# Altium PCB PCB.PcbDoc (part 1 of 2)
Units mil, origin at the board's own origin, x right, y up, seen from the top; angles counter-clockwise.
Board outline 2112 x 1014.5 mil, 4 copper layers (Top Layer, Layer 1, Layer 2, Bottom Layer), stack 36.268 mil thick; 45 components, 36 nets, 214 pads, 253 vias.
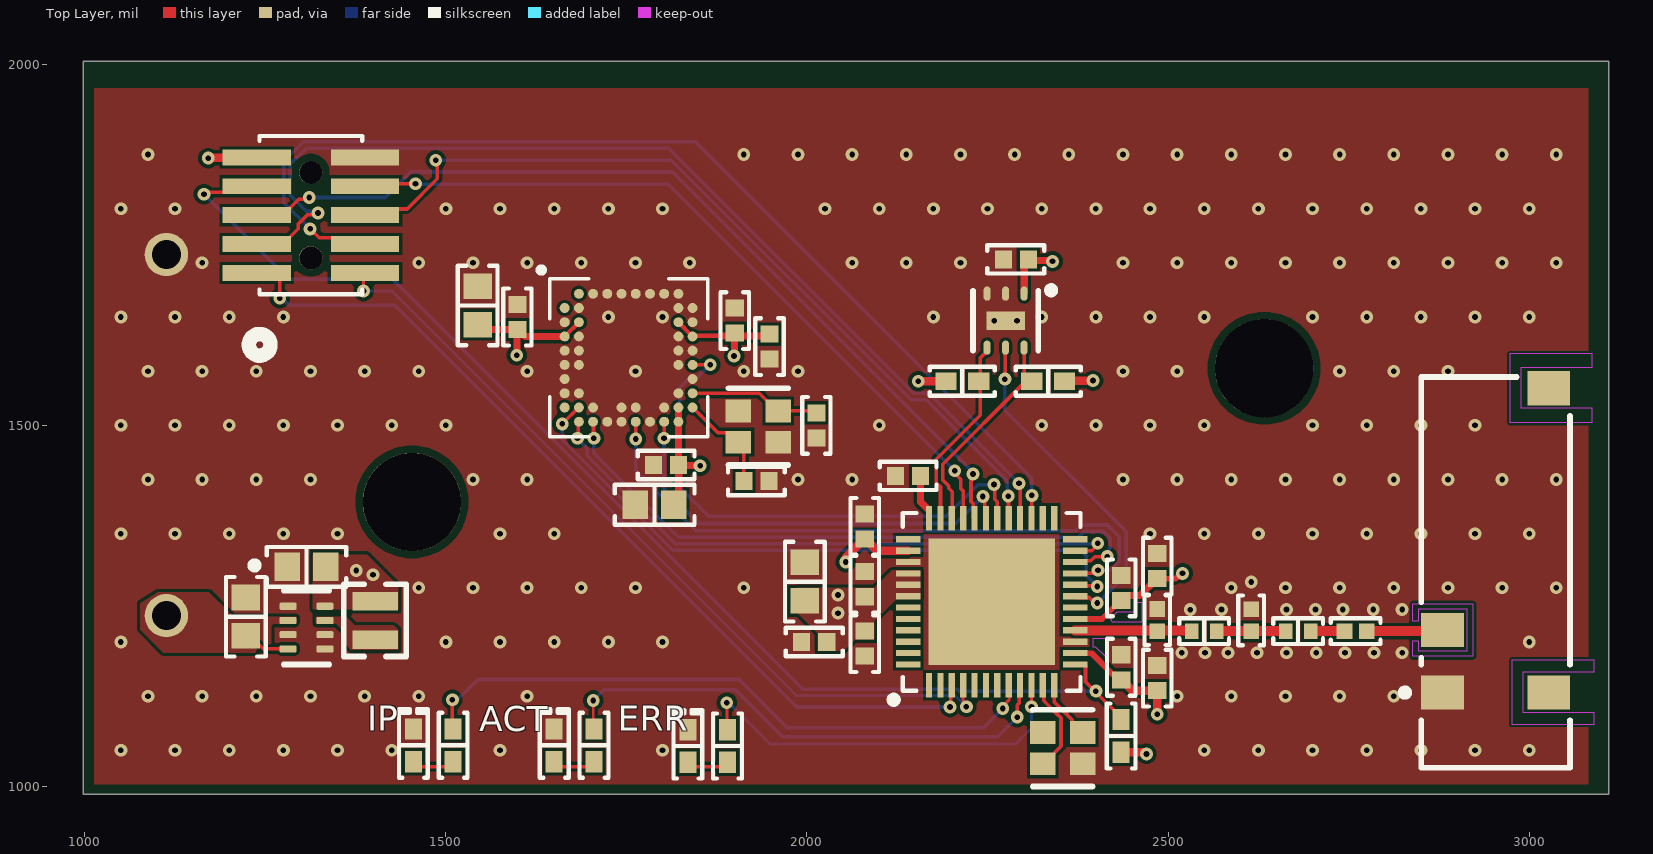
[diagram p0: Top Layer view]
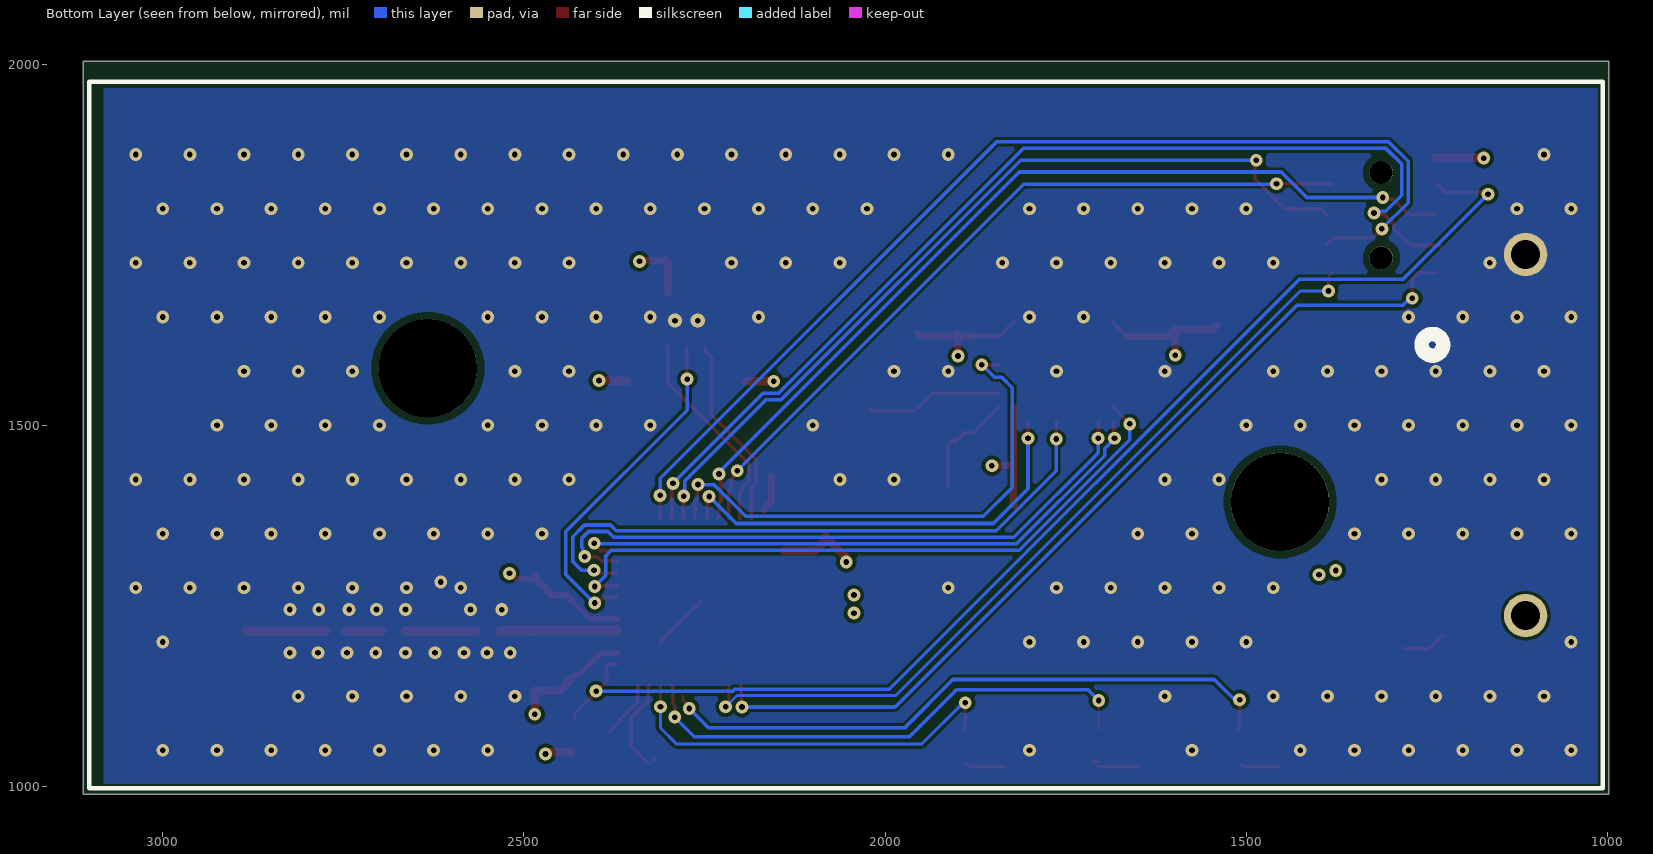
[diagram p1: Bottom Layer view, seen from below]
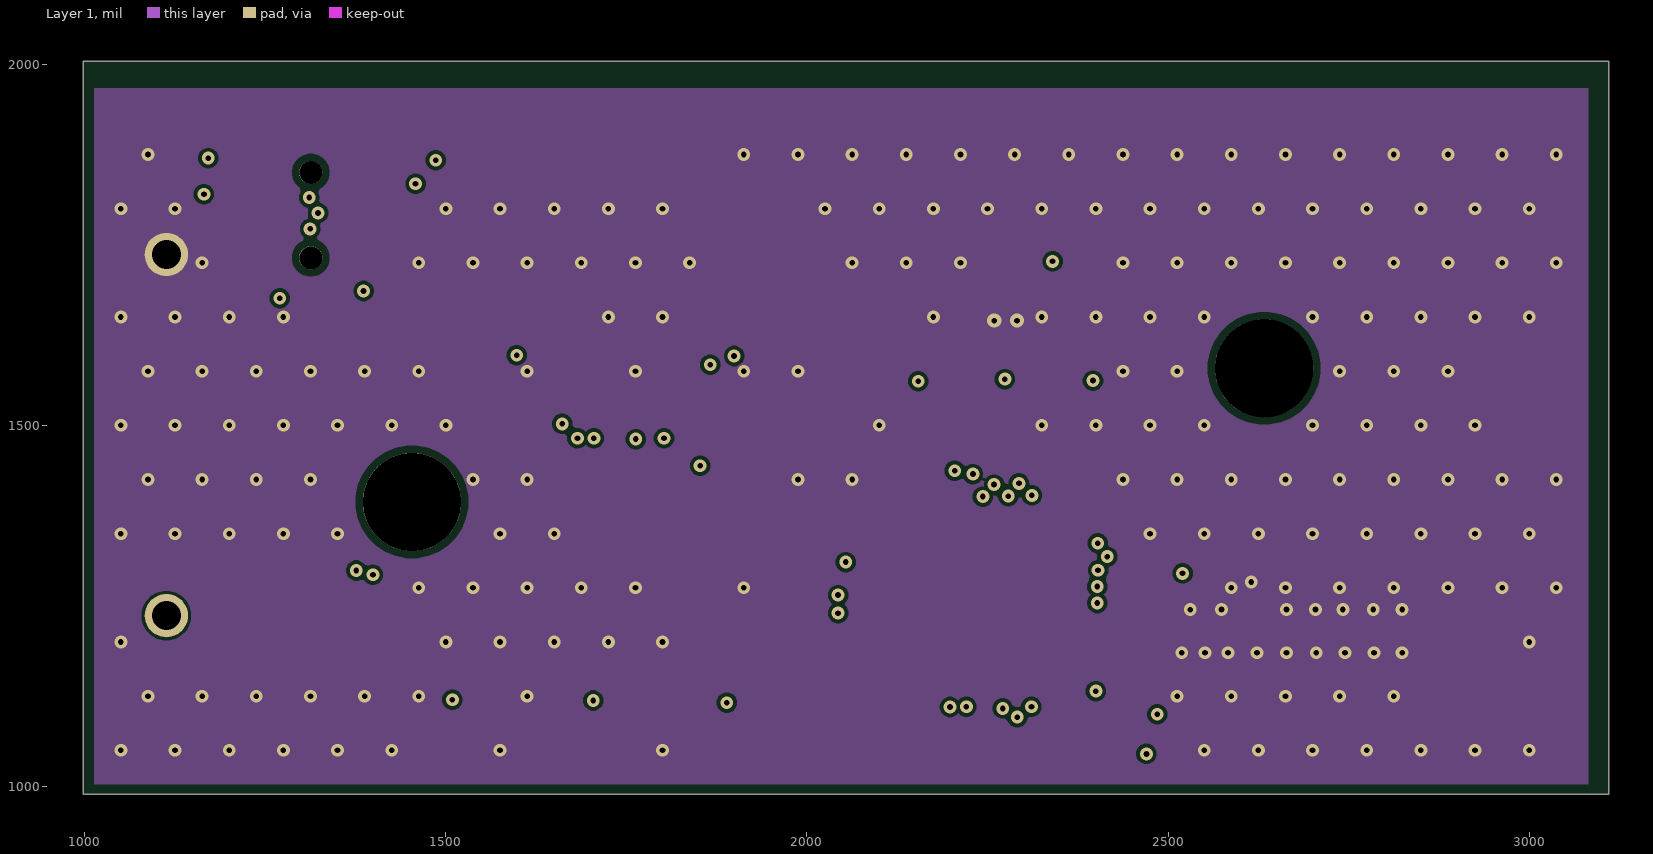
[diagram p2: Layer 1]
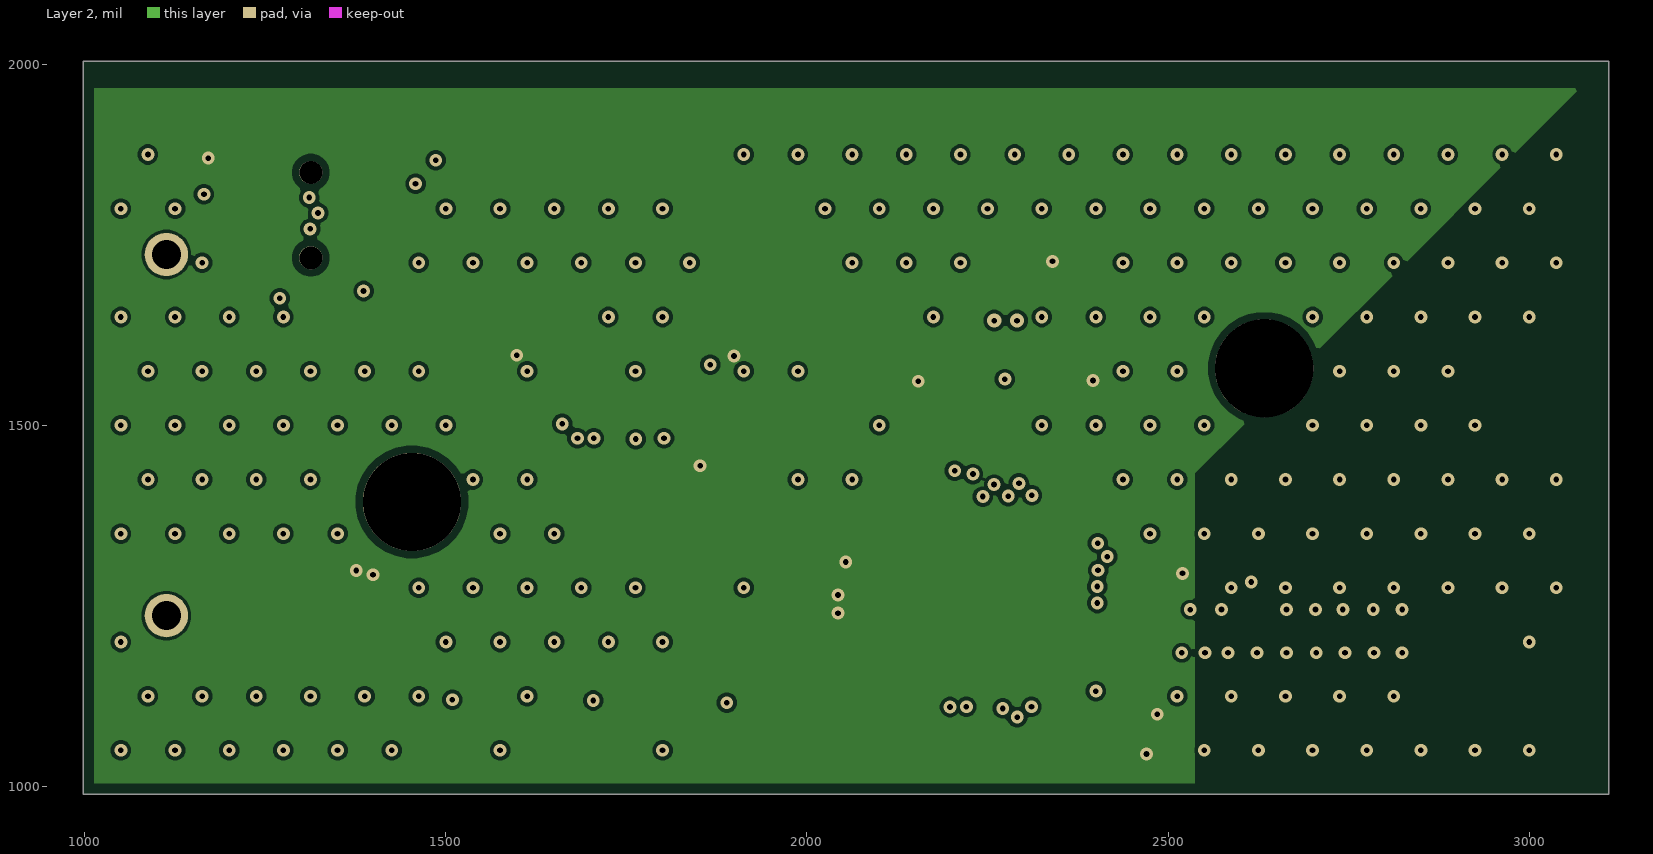
[diagram p3: Layer 2]

## Layer stack, top to bottom
Top Solder: solder mask 0.5, Solder Resist, Dk 3.8
Top Layer: signal copper 1.378
Dielectric 2: prepreg 8.284, PP-006, Dk 4.6
Layer 1: signal copper 0.598
Dielectric 1: dielectric 15.748, FR-4, Dk 4.6
Layer 2: signal copper 0.598
Dielectric 3: prepreg 8.284, PP-006, Dk 4.6
Bottom Layer: signal copper 1.378
Bottom Solder: solder mask 0.5, Solder Resist, Dk 3.8

## Board outline
998,989.5 3110,989.5 3110,2004 998,2004

## Design rules (kind name [scope] priority, off if disabled: settings)
BoardOutlineClearance [All] p1: gap=7.87 ignorepadtopadclearanceinfootprint=FALSE
Clearance [All] p1: gap=4 ignorepadtopadclearanceinfootprint=FALSE except(5: Arc-Via Track-Via SMDPad-Via THPad-Via Via-Via Via-Fill Via-Poly Via-Region Via-Text; 9.84: Arc-Hole Track-Hole SMDPad-Hole THPad-Hole Via-Hole Fill-Hole Poly-Hole Region-Hole Text-Hole)
ComponentClearance [All] p1: gap=4 collisioncheckmode=3 verticalgap=4 showdistances=TRUE
DiffPairsRouting [All] p1: maxlimit=4 minlimit=4 mostfreqgap=4 toplayer_minwidth=4 toplayer_maxwidth=71497.94 toplayer_prefwidth=4 midlayer1_minwidth=4 midlayer1_maxwidth=71497.94 midlayer1_prefwidth=4 midlayer2_minwidth=4 midlayer2_maxwidth=71497.94 midlayer2_prefwidth=4 bottomlayer_minwidth=4 bottomlayer_maxwidth=71497.94 bottomlayer_prefwidth=4 maxuncoupledlength=500
Height [All] p1: minheight=0 maxheight=71497.94 prefheight=500
HoleSize [All] p1: absolutevalues=TRUE maxlimit=248.03 minlimit=7.87 maxpercent=80.000 minpercent=20.000
HoleToHoleClearance [All] p1: gap=9.84 allowstackedmicrovias=FALSE
MinimumAnnularRing [All] p1: minimumring=3
MinimumSolderMaskSliver [All] p1: minsoldermaskwidth=0
PlaneClearance [All] p1: clearance=4
PlaneConnect PlaneConnectPowerPads [InPadClass('PowerPads')] p1: planeconnectstyle=Direct reliefexpansion=20 reliefentries=4 reliefconductorwidth=10 reliefairgap=10
PlaneConnect [All] p2: planeconnectstyle=Direct reliefexpansion=11.81 reliefentries=4 reliefconductorwidth=4 reliefairgap=4
PolygonConnect PolygonConnectPowerPads [All vs (InPadClass('PowerPads'))] p1: connectstyle=Direct reliefconductorwidth=10 reliefentries=4 polygonreliefangle="90 Angle" airgapwidth=10
PolygonConnect [All] p2: connectstyle=Direct reliefconductorwidth=4 reliefentries=4 polygonreliefangle="90 Angle" airgapwidth=4
RoutingVias [All] p1: holewidth=7.87 width=17.72 viastyle="Through Hole" minholewidth=7.87 minwidth=17.72 maxholewidth=248.03 maxwidth=257.87
SilkToSilkClearance [All] p1: silktosilkclearance=0
SilkToSolderMaskClearance [IsPad] p1: minsilkscreentomaskgap=4 clearancetoexposedcopper=TRUE
SolderMaskExpansion SolderMaskExpansion_Via [IsVia] p1: expansion=4 istentingtop=TRUE
SolderMaskExpansion [All] p2: expansion=1.5 istentingtop=FALSE
Width RF [InNetClass('RF')] p1: maxlimit=13.91 minlimit=8.57 preferedwidth=13.91 toplayer_minwidth=13.91 midlayer1_maxwidth=8.57 midlayer1_prefwidth=8.57 midlayer2_maxwidth=8.57 midlayer2_prefwidth=8.57 bottomlayer_minwidth=13.91 impedanceprofiledriven=TRUE impedanceprofileid={70AC5D85-C5B5-478E-8E20-9753D8737C4F} impedanceprofilevalue=50.000000 minimp=50.000000 maximp=50.000000 favimp=50.000000
Width [All] p2: maxlimit=71497.94 minlimit=4 preferedwidth=4
20 further rules are at their usual default settings.

## Classes and differential pairs
net class RF: NetANT1_2 NetC1_2 NetC3_2 NetC4_2
component class radar: C15 C17 C18 C19 C20 C25 R5 U2 U3 Y2
component class power: B1 C23 L3 U3 U4
component class mcu: C9 D1 D2 D3 J1 L1 L2 R1 R2 R3 R4 R5 R6 U1 U2 U4 Y1

## Components (designator, comment, footprint, x,y, rotation, side; value= is the part's Value field where it differs from the comment)
ANT1 "" FP-PRO-OB-440-MFG 2953.43,1296.34 r180 top
B1 "" 2468_KEY 1113,1236.5 r90 bottom
C1 "" "CAP 0402_1005 RF" 2759.65,1215 r180 top value="18 pF"
C2 "" "CAP 0402_1005" 2140,1430 r0 top value="1 µF"
C3 "" "CAP 0402_1005 RF" 2615,1230 r270 top value="1.6 pF"
C4 "" "CAP 0402_1005 RF" 2485,1230.35 r270 top value="2.3 pF"
C5 "" "CAP 0402_1005" 2080,1197.68 r90 top value="0.1 µF"
C6 "" "CAP 0402_1005" 2080,1280 r270 top value="0.1 µF"
C7 "" "CAP 0402_1005" 2080,1360 r270 top value="1 µF"
C8 "" "CAP 0402_1005" 2010,1200 r0 top value="1 µF"
C9 "" "CAP 0603_1608" 1997,1283.57 r270 top value="10 µF"
C10 "" "CAP 0402_1005" 2435,1165 r270 top value=100pF
C11 "" "CAP 0402_1005" 2435,1275 r270 top value="0.1 µF"
C12 "" "CAP 0402_1005" 2485,1150 r270 top value="0.1 µF"
C13 "" "CAP 0402_1005" 2485,1305 r270 top value="1 µF"
C14 "" "CAP 0402_1005" 2289.1,1729.78 r0 top value="0.1 µF"
C15 "" "CAP 0402_1005" 1930,1423 r180 top value="9 pF"
C16 "" "CAP 0402_1005" 2013,1500 r90 top value="9 pF"
C17 "" "CAP 0402_1005" 1805,1445 r0 top value="0.1 µF"
C18 "" "CAP 0402_1005" 1599,1650 r270 top value="0.1 µF"
C19 "" "CAP 0402_1005" 1900,1645 r270 top value="0.1 µF"
C20 "" "CAP 0402_1005" 1948,1609 r90 top value="1 µF"
C21 "" "CAP 0603_1608" 1544,1666 r90 top value="22 µF"
C22 "" "CAP 0603_1608" 1789,1390 r0 top value="22 µF"
C23 "" "CAP 0603_1608" 1223,1235 r270 top value=4.7uF
C24 "" "CAP 0603_1608" 1307,1304 r0 top value="10 µF"
D1 "" "LED 0402_1005 YELLOW" 1455,1057 r90 top value=Yellow
D2 "" "LED 0402_1005 YELLOW" 1650,1057 r90 top value=Yellow
D3 "" "LED 0402_1005 YELLOW" 1835,1056 r90 top value=Yellow
J1 "" CONN10_M40-3200545R_HRW 1313,1791 r90 top
L1 "" "IND 0402_1005 RF WW" 2680,1215 r180 top value="1.7 nH"
L2 "" "IND 0402_1005 RF WW" 2550,1215 r180 top value="2.5 nH"
L3 "" "TDK VLS201612CX" 1402,1230 r90 top value="2.2 µH"
R1 "" "RES 0402_1005" 1510,1057 r90 top
R2 "" "RES 0402_1005" 2334,1561 r0 top value="10 kOhms"
R3 "" "RES 0402_1005" 1705,1057 r90 top value="1.5 kOhms"
R4 "" "RES 0402_1005" 2215,1561 r180 top value="10 kOhms"
R5 "" "RES 0402_1005" 1890,1056 r90 top value="1.5 kOhms"
R6 "" "RES 0402_1005" 2435,1070 r90 top value="10 kOhms"
U1 "" QFN48_0p4_6sq_SIL 2255.63,1255.55 r90 top
U2 "" FP-DNP0006A-MFG 2275,1645 r270 top
U3 "" BGA50N50P10X10_520X550X89N 1753.04,1593.57 r0 top
U4 "" FP-DLC0008B-MFG 1307,1220 r0 top
Y1 "" FP-CX2016DB48000C0WPLA2-MFG 2354,1053 r0 top
Y2 "" FP-CX2016DB48000C0WPLA2-MFG 1932.56,1498.35 r0 top

## Footprints (in the part's own frame and the unit in brackets; to place one, negate y for a bottom-side part, rotate by r counter-clockwise, add the part's x,y. Pads: shape width x height; smd on the part's side, far side on the other; paste and mask are expansions set on the pad)
2468_KEY [mil]
  round 60 hole 40 mask+0: 1(0,0) 2(500,0)
  round 136 hole 136 unplated: 3(157.5,340) 4(342.5,1520)
  silkscreen extent -239,-107 739,1989, body extent 0,0 10,10, height 10
BGA50N50P10X10_520X550X89N [mm]
  round 0.35 smd: A2(-1.75,2.25) A3(-1.25,2.25) A4(-0.75,2.25) A5(-0.25,2.25) A6(0.25,2.25) A7(0.75,2.25) A8(1.25,2.25) A9(1.75,2.25) B1(-2.25,1.75) B2(-1.75,1.75) B9(1.75,1.75) B10(2.25,1.75) C1(-2.25,1.25) C2(-1.75,1.25) C9(1.75,1.25) C10(2.25,1.25) D1(-2.25,0.75) D2(-1.75,0.75) D9(1.75,0.75) D10(2.25,0.75) E1(-2.25,0.25) E2(-1.75,0.25) E9(1.75,0.25) E10(2.25,0.25) F1(-2.25,-0.25) F2(-1.75,-0.25) F9(1.75,-0.25) F10(2.25,-0.25) G1(-2.25,-0.75) G10(2.25,-0.75) H1(-2.25,-1.25) H2(-1.75,-1.25) H9(1.75,-1.25) H10(2.25,-1.25) J1(-2.25,-1.75) J2(-1.75,-1.75) J3(-1.25,-1.75) J5(-0.25,-1.75) J6(0.25,-1.75) J8(1.25,-1.75) J9(1.75,-1.75) J10(2.25,-1.75) K2(-1.75,-2.25) K3(-1.25,-2.25) K4(-0.75,-2.25) K5(-0.25,-2.25) K6(0.25,-2.25) K7(0.75,-2.25) K8(1.25,-2.25) K9(1.75,-2.25)
  silkscreen extent -3.17,-2.78 2.78,3.18
"CAP 0402_1005" [mm] "Chip Capacitor, 2-Leads, Body 1.02x0.51mm, IPC Medium Density"
  rect 0.6x0.64 smd: 1(-0.44,0) 2(0.44,0)
  silkscreen extent -1,-0.5 1,0.5, body extent -0.5,-0.26 0.5,0.26, height 0.52
"CAP 0402_1005 RF" [mm] "Chip Capacitor, 2-Leads, Body 1.02x0.51mm, IPC High Density"
  rect 0.55x0.54 smd: 1(-0.39,0) 2(0.39,0)
  silkscreen extent -0.87,-0.45 0.87,0.45, body extent -0.5,-0.26 0.5,0.26, height 0.52
"CAP 0603_1608" [mm] "Chip Capacitor, 2-Leads, Body 1.60x0.80mm, IPC Medium Density"
  rect 0.9x1 smd: 1(-0.675,0) 2(0.675,0)
  silkscreen extent -1.4,-0.7 1.4,0.7, body extent -0.8,-0.41 0.8,0.41, height 0.82
CONN10_M40-3200545R_HRW [mm]
  rect 0.56x2.4 smd paste+0 mask+0: 1(-2.032,1.905) 2(-1.016,1.905) 3(0,1.905) 4(1.016,1.905) 5(2.032,1.905) 6(-2.032,-1.905) 7(-1.016,-1.905) 8(0,-1.905) 9(1.016,-1.905) 10(2.032,-1.905)
  round 0.813 hole 0.813 unplated: 11(-1.5,0) 12(1.5,0)
  silkscreen extent -4.94,-1.8 2.78,2.18, body extent 0,0 0.25,0.25, height 0.25
FP-CX2016DB48000C0WPLA2-MFG [mm]
  rect 0.9x0.8 smd paste+0 mask+0: 1(-0.7,-0.55) 2(0.7,-0.55) 3(0.7,0.55) 4(-0.7,0.55)
  silkscreen extent -6.07,-1.35 1.05,1.83, body extent -1.25,-1.05 1.25,1.05, height 0.25
FP-DLC0008B-MFG [mm]
  rrect40% 0.6x0.25 smd paste+0 mask+0: 1(-0.65,0.75) 2(-0.65,0.25) 3(-0.65,-0.25) 4(-0.65,-0.75) 5(0.65,-0.75) 6(0.65,-0.25) 7(0.65,0.25) 8(0.65,0.75)
  silkscreen extent -1.95,-1.3 0.8,2.31, body extent -1.05,-1.15 1.05,1.15, height 0.25
FP-DNP0006A-MFG [mm]
  rrect100% 0.5x0.25 smd paste+0 mask+0: 1(-0.95,0.65) 2(-0.95,0) 3(-0.95,-0.65) 4(0.95,-0.65) 5(0.95,0) 6(0.95,0.65)
  rect 0.65x1.35 smd paste-1000 mask+0: 7(0,0)
  silkscreen extent -1.19,-1.15 1.05,1.73, body extent -1.3,-1.15 1.3,1.15, height 0.25
FP-PRO-OB-440-MFG [mm]
  rect 1.5x1.2 smd paste+0 mask+0: 1(1.865,4.225) 2(1.865,2.025) 3(-1.865,4.225) 4(-1.865,-6.475)
  silkscreen extent -2.62,-6.88 3.31,6.88
"IND 0402_1005 RF WW" [mm] "Chip Inductor, 2-Leads, Body 1.00x0.50mm, IPC High Density"
  rect 0.48x0.54 smd: 1(-0.44,0) 2(0.44,0)
  silkscreen extent -0.87,-0.45 0.87,0.45, body extent -0.5,-0.29 0.5,0.29, height 0.51
"LED 0402_1005 YELLOW" [mm] "Chip Diode, 2-Leads, Body 1.00x0.50mm, IPC Medium Density"
  rect 0.75x0.6 smd: 1(-0.575,0) 2(0.575,0)
  silkscreen extent -1.14,-0.51 1.27,0.51, body extent -0.5,-0.25 0.5,0.25, height 0.21
QFN48_0p4_6sq_SIL [mm]
  rect 0.86x0.22 smd paste+0 mask+0: 1(-2.935,2.2) 2(-2.935,1.8) 3(-2.935,1.4) 4(-2.935,1) 5(-2.935,0.6) 6(-2.935,0.2) 7(-2.935,-0.2) 8(-2.935,-0.6) 9(-2.935,-1) 10(-2.935,-1.4) 11(-2.935,-1.8) 12(-2.935,-2.2) 25(2.935,-2.2) 26(2.935,-1.8) 27(2.935,-1.4) 28(2.935,-1) 29(2.935,-0.6) 30(2.935,-0.2) 31(2.935,0.2) 32(2.935,0.6) 33(2.935,1) 34(2.935,1.4) 35(2.935,1.8) 36(2.935,2.2)
  rect 0.22x0.86 smd paste+0 mask+0: 13(-2.2,-2.935) 14(-1.8,-2.935) 15(-1.4,-2.935) 16(-1,-2.935) 17(-0.6,-2.935) 18(-0.2,-2.935) 19(0.2,-2.935) 20(0.6,-2.935) 21(1,-2.935) 22(1.4,-2.935) 23(1.8,-2.935) 24(2.2,-2.935) 37(2.2,2.935) 38(1.8,2.935) 39(1.4,2.935) 40(1,2.935) 41(0.6,2.935) 42(0.2,2.935) 43(-0.2,2.935) 44(-0.6,2.935) 45(-1,2.935) 46(-1.4,2.935) 47(-1.8,2.935) 48(-2.2,2.935)
  rect 4.45x4.45 smd paste-2.212 mask+0: 49(0,0)
  silkscreen extent -3.13,-3.13 3.13,3.13, body extent -3,-3 3,3, height 0.9
"RES 0402_1005" [mm] "Chip Resistor, 2-Leads, Body 1.0x0.5mm, IPC Medium Density"
  rect 0.75x0.6 smd: 1(-0.575,0) 2(0.575,0)
  silkscreen extent -1.14,-0.51 1.14,0.51, body extent -0.5,-0.25 0.5,0.25, height 0.35
"TDK VLS201612CX" [mm] "Inductor, 2-Leads, Body 2.00x1.60mm, IPC Medium Density"
  rect 0.65x1.6 smd: 1(-0.675,0) 2(0.675,0)
  silkscreen extent -1.27,-1.1 1.27,1.1, body extent -1,-0.8 1,0.8, height 1.2

## Part data
ANT1: library part CMP-231248-000001-1, "RF ANT 2.4GHZ STAMPED MET SLD", Manufacturer=ProAnt, Manufacturer Part Number=PRO-OB-440, Max Frequency=2500MHz, Temperature="-40°C to +125°C", Temperature Range High=+125°C, Temperature Range Low=-40°C, Automotive=No, Bandwidth=2400-2500MHz, Category=Ant, ComponentLink2Description=Datasheet, ComponentLink2URL=http://www.proant.se/files/user/Documents/Datasheets%20and%20appnotes/Upload%202018-06-08/Application%20note%20-%20OnBoard%20SMD%202400%20MHz%20rev%203.2.pdf, Device Class L1="Integrated Circuits (ICs)", Device Class L2="RF Semiconductors and Devices", Device Class L3="RF Antennas", Digikey Description="RF ANT 2.4GHZ STAMPED MET SLD", Height=3.53mm, Impedance=50Ω, Lead Free=Yes, Number Of Bands=1, Octopart=https://octopart.com/pro-ob-440-proant+ab-62921801, Package=PRO-OB-440, Return Loss=-10dB, RoHS=TRUE
B1: library part 2468, "No Description Available", Mfr_Name="Keystone Electronics", Copyright="Copyright (C) 2022 Ultra Librarian. All rights reserved.", Manufacturer_Part_Number=2468, RefDes=RefDes, Type=DEV
C1: library part 600L180FW200T, "CAP CER 18PF 200V NP0 0402", Capacitance="18 pF", Device Package="0402 (1005 Metric)", Manufacturer="American Technical Ceramics", Operating Temperature="-55°C ~ 125°C", Supplier Part Number 1=478-12298-1-ND, Temperature Coefficient="C0G, NP0", Tolerance=±1%, Voltage - Rated=200V, Applications="RF, Microwave, High Frequency, Bypass, Decoupling", componentlink1description=Datasheet, componentlink1url=http://www.atceramics.com/UserFiles/600l.pdf, ComponentLink2Description="DigiKey Link", ComponentLink2URL=https://www.digikey.com/en/products/detail/american-technical-ceramics/600L180FW200T/3908918, Features="High Q, Low Loss, Ultra Low ESR", lastupdated="1/9/2022 1:07:41 pm", Lifecycle Status=Active, Minimum Order=1, Mounting Type="Surface Mount, MLCC", Package / Case="0402 (1005 Metric)", packaging=TapeAndReel, Part Number=600L180FW200T, Part Status=Active, partid=1343, price=0.49, series="ATC 600L", Size / Dimension="0.040\" L x 0.020\" W (1.02mm x 0.51mm)", Supplier 1=DigiKey, Thickness (Max)="0.024\" (0.60mm)"
C2: library part C0402C104K7PAC7867, "CAP CER 0.1UF 4V X5R 0402", Capacitance="1 µF", Device Package="0402 (1005 Metric)", Manufacturer=KEMET, Operating Temperature="-55°C ~ 85°C", Supplier Part Number 1=399-14871-1-ND, Temperature Coefficient=X5R, Tolerance=±10%, Voltage - Rated=4V, Applications="Bypass, Decoupling", componentlink1description=Datasheet, componentlink1url=https://api.kemet.com/component-edge/download/datasheet/C0402C104K7PAC7867.pdf, ComponentLink2Description="DigiKey Link", ComponentLink2URL=https://www.digikey.com/en/products/detail/kemet/C0402C104K7PAC7867/7381987, lastupdated="1/9/2022 12:30:40 pm", Lifecycle Status=Active, Minimum Order=1, Mounting Type="Surface Mount, MLCC", Package / Case="0402 (1005 Metric)", packaging=TapeAndReel, Part Number=C0402C104K7PAC7867, Part Status=Active, partid=5603, price=0.01, series="SMD Comm X5R", Size / Dimension="0.039\" L x 0.020\" W (1.00mm x 0.50mm)", Supplier 1=DigiKey, Thickness (Max)="0.022\" (0.55mm)"
C3: library part GJM1555C1H1R6CB01D, "CAP CER 1.6PF 50V C0G/NP0 0402", Capacitance="1.6 pF", Device Package="0402 (1005 Metric)", Manufacturer="Murata Electronics", Operating Temperature="-55°C ~ 125°C", Supplier Part Number 1=490-3088-1-ND, Temperature Coefficient="C0G, NP0", Tolerance=±0.25pF, Voltage - Rated=50V, Applications="RF, Microwave, High Frequency", componentlink1description=Datasheet, componentlink1url=https://search.murata.co.jp/Ceramy/image/img/A01X/G101/ENG/GJM1555C1H1R6CB01-01.pdf, ComponentLink2Description="DigiKey Link", ComponentLink2URL=https://www.digikey.com/en/products/detail/murata-electronics/GJM1555C1H1R6CB01D/702281, Features="High Q, Low Loss", lastupdated="1/9/2022 1:07:42 pm", Lifecycle Status=Active, Minimum Order=1, Mounting Type="Surface Mount, MLCC", Package / Case="0402 (1005 Metric)", packaging=TapeAndReel, Part Number=GJM1555C1H1R6CB01D, Part Status=Active, partid=624, price=0.01, series=GJM, Size / Dimension="0.039\" L x 0.020\" W (1.00mm x 0.50mm)", Supplier 1=DigiKey, Thickness (Max)="0.022\" (0.55mm)"
C4: library part GJM1555C1H2R3BB01D, "CAP CER 2.3PF 50V C0G/NP0 0402", Capacitance="2.3 pF", Device Package="0402 (1005 Metric)", Manufacturer="Murata Electronics", Operating Temperature="-55°C ~ 125°C", Supplier Part Number 1=490-GJM1555C1H2R3BB01DCT-ND, Temperature Coefficient="C0G, NP0", Tolerance=±0.1pF, Voltage - Rated=50V, Applications="RF, Microwave, High Frequency", componentlink1description=Datasheet, componentlink1url=https://search.murata.co.jp/Ceramy/image/img/A01X/G101/ENG/GJM1555C1H2R3BB01-01.pdf, ComponentLink2Description="DigiKey Link", ComponentLink2URL=https://www.digikey.com/en/products/detail/murata-electronics/GJM1555C1H2R3BB01D/2592923, Features="High Q, Low Loss", lastupdated="1/9/2022 1:07:39 pm", Lifecycle Status=Active, Minimum Order=1, Mounting Type="Surface Mount, MLCC", Package / Case="0402 (1005 Metric)", packaging=TapeAndReel, Part Number=GJM1555C1H2R3BB01D, Part Status=Active, partid=2854, price=0.02, series=GJM, Size / Dimension="0.039\" L x 0.020\" W (1.00mm x 0.50mm)", Supplier 1=DigiKey, Thickness (Max)="0.022\" (0.55mm)"
C5 C11 C12 C14 C17 C18 C19: library part C0402C104K7PAC7867, "CAP CER 0.1UF 4V X5R 0402", Capacitance="0.1 µF", Device Package="0402 (1005 Metric)", Manufacturer=KEMET, Operating Temperature="-55°C ~ 85°C", Supplier Part Number 1=399-14871-1-ND, Temperature Coefficient=X5R, Tolerance=±10%, Voltage - Rated=4V, Applications="Bypass, Decoupling", componentlink1description=Datasheet, componentlink1url=https://api.kemet.com/component-edge/download/datasheet/C0402C104K7PAC7867.pdf, ComponentLink2Description="DigiKey Link", ComponentLink2URL=https://www.digikey.com/en/products/detail/kemet/C0402C104K7PAC7867/7381987, Lifecycle Status=Active, Minimum Order=1, Mounting Type="Surface Mount, MLCC", Package / Case="0402 (1005 Metric)", packaging=TapeAndReel, Part Number=C0402C104K7PAC7867, Part Status=Active, partid=5603, price=0.01, series="SMD Comm X5R", Size / Dimension="0.039\" L x 0.020\" W (1.00mm x 0.50mm)", Supplier 1=DigiKey, Thickness (Max)="0.022\" (0.55mm)"
  C5 C11 C12 C14: lastupdated="1/9/2022 12:30:40 pm"
  C17 C18 C19: lastupdated="11/9/2022 9:36:31 am"
C6: library part C0402C104K4RECAUTO, "CAP CER 0402 0.1UF 16V X7R 10%", Capacitance="0.1 µF", Device Package="0402 (1005 Metric)", Manufacturer=KEMET, Operating Temperature="-55°C ~ 125°C", Ratings=AEC-Q200, Supplier Part Number 1=399-17167-1-ND, Temperature Coefficient=X7R, Tolerance=±10%, Voltage - Rated=16V, Applications="Automotive, ESD Protection", componentlink1description=Datasheet, componentlink1url=https://api.kemet.com/component-edge/download/datasheet/C0402C104K4RECAUTO.pdf, ComponentLink2Description="DigiKey Link", ComponentLink2URL=https://www.digikey.com/en/products/detail/kemet/C0402C104K4RECAUTO/8563695, lastupdated="1/9/2022 12:30:53 pm", Lifecycle Status=Active, Minimum Order=1, Mounting Type="Surface Mount, MLCC", Package / Case="0402 (1005 Metric)", packaging=TapeAndReel, Part Number=C0402C104K4RECAUTO, Part Status=Active, partid=1731, price=0.01, series="ESD SMD Auto X7R", Size / Dimension="0.039\" L x 0.020\" W (1.00mm x 0.50mm)", Supplier 1=DigiKey, Thickness (Max)="0.022\" (0.55mm)"
C7 C8: library part LMK105BJ105MVHF, "CAP CER 1UF 10V X5R 0402", Capacitance="1 µF", Device Package="0402 (1005 Metric)", Manufacturer="Taiyo Yuden", Operating Temperature="-55°C ~ 85°C", Ratings=AEC-Q200, Supplier Part Number 1=587-6276-1-ND, Temperature Coefficient=X5R, Tolerance=±20%, Voltage - Rated=10V, Applications="Automotive, SMPS Filtering", componentlink1description=Datasheet, componentlink1url="https://ds.yuden.co.jp/TYCOMPAS/ut/detail?pn=LMK105BJ105MVHF &u=M", ComponentLink2Description="DigiKey Link", ComponentLink2URL=https://www.digikey.com/en/products/detail/taiyo-yuden/LMK105BJ105MVHF/7403746, lastupdated="1/9/2022 12:30:35 pm", Lifecycle Status=Active, Minimum Order=1, Mounting Type="Surface Mount, MLCC", Package / Case="0402 (1005 Metric)", packaging=TapeAndReel, Part Number=LMK105BJ105MVHF, Part Status=Active, partid=46675, price=0.01, series=M, Size / Dimension="0.039\" L x 0.020\" W (1.00mm x 0.50mm)", Supplier 1=DigiKey, Thickness (Max)="0.022\" (0.55mm)"
C9 C23 C24: library part GRM188R60J106ME47D, "CAP CER 10UF 6.3V X5R 0603", Capacitance="10 µF", Device Package="0603 (1608 Metric)", Manufacturer="Murata Electronics", Operating Temperature="-55°C ~ 85°C", Supplier Part Number 1=490-3896-1-ND, Temperature Coefficient=X5R, Tolerance=±20%, Voltage - Rated=6.3V, Applications="General Purpose", componentlink1description=Datasheet, componentlink1url=https://www.murata.com/~/media/webrenewal/support/library/catalog/products/capacitor/mlcc/c02e.ashx?la=en-us, ComponentLink2Description="DigiKey Link", ComponentLink2URL=https://www.digikey.com/en/products/detail/murata-electronics/GRM188R60J106ME47D/965910, lastupdated="11/9/2022 9:40:24 am", Lifecycle Status=Active, Minimum Order=1, Mounting Type="Surface Mount, MLCC", Package / Case="0603 (1608 Metric)", packaging=TapeAndReel, Part Number=GRM188R60J106ME47D, Part Status=Active, partid=2351, price=0.02, series=GRM, Size / Dimension="0.063\" L x 0.031\" W (1.60mm x 0.80mm)", Supplier 1=DigiKey, Thickness (Max)="0.035\" (0.90mm)"
C10: library part 04026C101KAT2A, "CAP CER 100PF 6.3V X7R 0402", Capacitance=100pF, Device Package="0402 (1005 Metric)", Manufacturer="AVX Corporation", Operating Temperature="-55°C ~ 125°C", Supplier Part Number 1=478-12647-1-ND, Temperature Coefficient=X7R, Tolerance=±10%, Voltage - Rated=6.3V, Applications="General Purpose", componentlink1description=Datasheet, componentlink1url=http://datasheets.avx.com/X7RDielectric.pdf, ComponentLink2Description="DigiKey Link", ComponentLink2URL=http://digikey.com/product-detail/en/avx-corporation/04026C101KAT2A/478-12647-1-ND/9949180, lastupdated="8/2/2022 12:26:54 pm", Lifecycle Status=Active, Minimum Order=1, Mounting Type="Surface Mount, MLCC", Package / Case="0402 (1005 Metric)", packaging=TapeAndReel, Part Number=04026C101KAT2A, Part Status=Active, partid=4266, price=0.04, series=-, Size / Dimension="0.039\" L x 0.020\" W (1.00mm x 0.50mm)", Supplier 1=DigiKey, Thickness (Max)="0.022\" (0.56mm)"
C13: library part CGB2T1X5R0G105M022BC, "CAP CER 1UF 4V X5R 0402", Capacitance="1 µF", Device Package="0402 (1005 Metric)", Manufacturer="TDK Corporation", Operating Temperature="-55°C ~ 85°C", Supplier Part Number 1=445-15611-1-ND, Temperature Coefficient=X5R, Tolerance=±20%, Voltage - Rated=4V, Applications="General Purpose", componentlink1description=Datasheet, componentlink1url=https://product.tdk.com/info/en/catalog/datasheets/mlcc_commercial_lowprofile_en.pdf?ref_disty=digikey, ComponentLink2Description="DigiKey Link", ComponentLink2URL=https://www.digikey.com/en/products/detail/tdk-corporation/CGB2T1X5R0G105M022BC/4278344, Features="Low Profile", lastupdated="1/9/2022 12:30:48 pm", Lifecycle Status=Active, Minimum Order=1, Mounting Type="Surface Mount, MLCC", Package / Case="0402 (1005 Metric)", packaging=TapeAndReel, Part Number=CGB2T1X5R0G105M022BC, Part Status=Active, partid=2563, price=0.08, series=CGB, Size / Dimension="0.039\" L x 0.020\" W (1.00mm x 0.50mm)", Supplier 1=DigiKey, Thickness (Max)="0.009\" (0.22mm)"
C15 C16: library part CGA2B2C0G1H090D050BA, "CAP CER 9PF 50V C0G 0402", Capacitance="9 pF", Device Package="0402 (1005 Metric)", Manufacturer="TDK Corporation", Operating Temperature="-55°C ~ 125°C", Ratings=AEC-Q200, Supplier Part Number 1=445-5583-1-ND, Temperature Coefficient="C0G, NP0", Tolerance=±0.5pF, Voltage - Rated=50V, Applications=Automotive, componentlink1description=Datasheet, componentlink1url=https://product.tdk.com/info/en/catalog/datasheets/mlcc_automotive_general_en.pdf?ref_disty=digikey, ComponentLink2Description="DigiKey Link", ComponentLink2URL=https://www.digikey.com/en/products/detail/tdk-corporation/CGA2B2C0G1H090D050BA/2443061, lastupdated="14/9/2022 7:45:59 am", Lifecycle Status=Active, Minimum Order=1, Mounting Type="Surface Mount, MLCC", Package / Case="0402 (1005 Metric)", packaging=TapeAndReel, Part Number=CGA2B2C0G1H090D050BA, Part Status=Active, partid=7122, price=0.01, series=CGA, Size / Dimension="0.039\" L x 0.020\" W (1.00mm x 0.50mm)", Supplier 1=DigiKey, Thickness (Max)="0.022\" (0.55mm)"
C20: library part LMK105C6105KV-F, "CAP CER 1UF 10V X6S 0402", Capacitance="1 µF", Device Package="0402 (1005 Metric)", Manufacturer="Taiyo Yuden", Operating Temperature="-55°C ~ 105°C", Supplier Part Number 1=587-3409-1-ND, Temperature Coefficient=X6S, Tolerance=±10%, Voltage - Rated=10V, Applications="SMPS Filtering", componentlink1description=Datasheet, componentlink1url=https://www.yuden.co.jp/productdata/catalog/mlcc01_e.pdf, ComponentLink2Description="DigiKey Link", ComponentLink2URL=https://www.digikey.com/en/products/detail/taiyo-yuden/LMK105C6105KV-F/4157226, lastupdated="11/9/2022 9:36:40 am", Lifecycle Status=Active, Minimum Order=1, Mounting Type="Surface Mount, MLCC", Package / Case="0402 (1005 Metric)", packaging=TapeAndReel, Part Number=LMK105C6105KV-F, Part Status=Active, partid=2215, price=0.01, series=M, Size / Dimension="0.039\" L x 0.020\" W (1.00mm x 0.50mm)", Supplier 1=DigiKey, Thickness (Max)="0.022\" (0.55mm)"
C21 C22: library part 0603ZD226MAT2A, "CAP CER 22UF 10V X5R 0603", Part Number=0603ZD226MAT2A
D1 D2 D3: library part BL-HKC37A-AV-TRB, "0402 YELLOW", Color=Yellow, Current - Test=20mA, Device Package="0402 (1005 Metric)", Lens Color=Colorless, Manufacturer="American Bright Optoelectronics Corporation", Millicandela Rating=120mcd, Supplier Device Package=0402, Supplier Part Number 1=BL-HKC37A-AV-TRBCT-ND, Voltage - Forward (Vf) (Typ)=2.2V, componentlink1description=Datasheet, componentlink1url=https://americanbrightled.com/pdffiles/smt/BL-HKC37A-AV-TRB.pdf, ComponentLink2Description="DigiKey Link", ComponentLink2URL=https://www.digikey.com/en/products/detail/american-bright-optoelectronics-corporation/BL-HKC37A-AV-TRB/9678171, Configuration=Standard, Height (Max)=0.45mm, lastupdated="11/9/2022 10:29:51 am", Lens Style="Rectangle with Flat Top", Lens Transparency=Clear, Lifecycle Status=Active, Minimum Order=1, Mounting Type="Surface Mount", Package / Case="0402 (1005 Metric)", packaging=TapeAndReel, Part Number=BL-HKC37A-AV-TRB, Part Status=Active, partid=1041, price=0.06, series=-, Size / Dimension="1.00mm L x 0.50mm W", Supplier 1=DigiKey, Viewing Angle=120°, Wavelength - Dominant=589nm, Wavelength - Peak=590nm
J1: library part M40-3200545R, "No Description Available", Mfr_Name=Harwin, Copyright="Copyright (C) 2022 Ultra Librarian. All rights reserved.", Manufacturer_Part_Number=M40-3200545R, RefDes=RefDes, Type=DEV
L1: library part LQW15AN1N7D8ZD, "FIXED IND 1.7NH 1.15A 65MOHM SMD", Current Rating (Amps)="1.15 A", DC Resistance (DCR)="65mOhm Max", Device Package="0402 (1005 Metric)", Frequency - Self Resonant=18GHz, Inductance="1.7 nH", Inductance Frequency - Test="100 MHz", Manufacturer="Murata Electronics", Operating Temperature="-55°C ~ 125°C", Q @ Freq="20 @ 250MHz", Ratings=AEC-Q200, Supplier Part Number 1=490-15358-1-ND, Tolerance=±0.5nH, componentlink1description=Datasheet, componentlink1url=https://search.murata.co.jp/Ceramy/image/img/P02/JELF243A-9138.pdf, ComponentLink2Description="DigiKey Link", ComponentLink2URL=https://www.digikey.com/en/products/detail/murata-electronics/LQW15AN1N7D8ZD/6798783, Height - Seated (Max)="0.024\" (0.60mm)", lastupdated="1/9/2022 1:17:33 pm", Lifecycle Status=Active, Material - Core=Non-Magnetic, Minimum Order=1, Mounting Type="Surface Mount", Package / Case="0402 (1005 Metric)", packaging=TapeAndReel, Part Number=LQW15AN1N7D8ZD, Part Status=Active, partid=80, price=0.07, series=LQW15, Shielding=Unshielded, Size / Dimension="0.039\" L x 0.024\" W (1.00mm x 0.60mm)", Supplier 1=DigiKey, Supplier Device Package="0402 (1005 Metric)", Type=Wirewound
L2: library part LQW15AN2N5B00D, "FIXED IND 2.5NH 850MA 50MOHM SMD", Current Rating (Amps)="850 mA", DC Resistance (DCR)="50mOhm Max", Device Package="0402 (1005 Metric)", Frequency - Self Resonant=15GHz, Inductance="2.5 nH", Inductance Frequency - Test="100 MHz", Manufacturer="Murata Electronics", Operating Temperature="-55°C ~ 125°C", Q @ Freq="20 @ 250MHz", Supplier Part Number 1=490-8437-1-ND, Tolerance=±0.1nH, componentlink1description=Datasheet, componentlink1url=https://search.murata.co.jp/Ceramy/image/img/P02/JELF243A-0050.pdf, ComponentLink2Description="DigiKey Link", ComponentLink2URL=https://www.digikey.com/en/products/detail/murata-electronics/LQW15AN2N5B00D/2594886, Height - Seated (Max)="0.024\" (0.60mm)", lastupdated="1/9/2022 1:17:31 pm", Lifecycle Status=Active, Material - Core=Non-Magnetic, Minimum Order=1, Mounting Type="Surface Mount", Package / Case="0402 (1005 Metric)", packaging=TapeAndReel, Part Number=LQW15AN2N5B00D, Part Status=Active, partid=337, price=0.05, series=LQW15, Shielding=Unshielded, Size / Dimension="0.039\" L x 0.024\" W (1.00mm x 0.60mm)", Supplier 1=DigiKey, Type=Wirewound
L3: library part VLS201612CX-6R8M-1, "FIXED IND 6.8UH 930MA 368MOHM SM", Current - Saturation=730mA, Current Rating (Amps)="930 mA", DC Resistance (DCR)="368mOhm Max", Device Package=Nonstandard, Inductance="6.8 µH", Inductance Frequency - Test="1 MHz", Manufacturer="TDK Corporation", Operating Temperature="-40°C ~ 105°C", Supplier Device Package=2016, Supplier Part Number 1=445-172966-1-ND, Tolerance=±20%, componentlink1description=Datasheet, componentlink1url=https://product.tdk.com/info/en/catalog/datasheets/inductor_commercial_power_vls201612cx-1_en.pdf?ref_disty=digikey, ComponentLink2Description="DigiKey Link", ComponentLink2URL=https://www.digikey.com/en/products/detail/tdk-corporation/VLS201612CX-6R8M-1/5169771, Height - Seated (Max)="0.047\" (1.20mm)", lastupdated="11/9/2022 10:31:03 am", Lifecycle Status=Active, Material - Core=Ferrite, Minimum Order=1, Mounting Type="Surface Mount", Package / Case=Nonstandard, packaging=TapeAndReel, Part Number=VLS201612CX-6R8M-1, Part Status=Active, partid=207, price=0.13, series=VLS-CX-1, Shielding=Shielded, Size / Dimension="0.079\" L x 0.063\" W (2.00mm x 1.60mm)", Supplier 1=DigiKey, Type="Drum Core, Wirewound"
R1 R3 R5: library part ERA-2VRW1501X, "RES 1.5K OHM 0.05% 1/10W 0402", Device Package="0402 (1005 Metric)", Manufacturer="Panasonic Electronic Components", Operating Temperature="-55°C ~ 155°C", Power (Watts)="0.1W, 1/10W", Ratings=AEC-Q200, Resistance="1.5 kOhms", Supplier Device Package=0402, Supplier Part Number 1=10-ERA-2VRW1501XCT-ND, Temperature Coefficient=±10ppm/°C, Tolerance=±0.05%, componentlink1description=Datasheet, componentlink1url=https://api.pim.na.industrial.panasonic.com/file_stream/main/fileversion/9152, ComponentLink2Description="DigiKey Link", ComponentLink2URL=https://www.digikey.com/en/products/detail/panasonic-electronic-components/ERA-2VRW1501X/12086957, Composition="Thin Film", Features="Anti-Sulfur, Automotive AEC-Q200", Height - Seated (Max)="0.016\" (0.40mm)", lastupdated="11/9/2022 9:53:08 am", Lifecycle Status=Active, Minimum Order=1, Number of Terminations=2, Package / Case="0402 (1005 Metric)", packaging=TapeAndReel, Part Number=ERA-2VRW1501X, Part Status=Active, partid=67400, price=0.24, series=ERA-2V, Size / Dimension="0.039\" L x 0.020\" W (1.00mm x 0.50mm)", Supplier 1=DigiKey
R2 R4 R6: library part RP73PF1E10KBTD, "RES 10K OHM 0.1% 1/10W 0402", Device Package="0402 (1005 Metric)", Manufacturer="TE Connectivity Passive Product", Operating Temperature="-55°C ~ 155°C", Power (Watts)="0.1W, 1/10W", Resistance="10 kOhms", Supplier Device Package=0402, Supplier Part Number 1=A127415CT-ND, Temperature Coefficient=±25ppm/°C, Tolerance=±0.1%, componentlink1description=Datasheet, componentlink1url=https://www.te.com/commerce/DocumentDelivery/DDEController?Action=srchrtrv&DocNm=1773272&DocType=DS&DocLang=English, ComponentLink2Description="DigiKey Link", ComponentLink2URL=https://www.digikey.com/en/products/detail/te-connectivity-passive-product/RP73PF1E10KBTD/8260957, Composition="Thin Film", Height - Seated (Max)="0.014\" (0.35mm)", lastupdated="1/9/2022 12:46:57 pm", Lifecycle Status=Active, Minimum Order=1, Number of Terminations=2, Package / Case="0402 (1005 Metric)", packaging=TapeAndReel, Part Number=RP73PF1E10KBTD, Part Status=Active, partid=2434, price=0.09, series="RP73, Holsworthy", Size / Dimension="0.039\" L x 0.020\" W (1.00mm x 0.50mm)", Supplier 1=DigiKey
U1: library part EFR32MG24B220F1536IM48, "No Description Available", Mfr_Name="Silicon Labs", Copyright="Copyright (C) 2022 Ultra Librarian. All rights reserved.", Manufacturer_Part_Number=EFR32MG24B220F1536IM48, RefDes=RefDes, Type=DEV
U2: library part CMP-04942-000002-1, "SENSOR OPT 550NM AMBIENT 6USON", Manufacturer="Texas Instruments", Manufacturer Part Number=OPT3001DNPR, Max Junction Temp=+150°C, Max Supply Voltage=3.6V, Min Supply Voltage=1.6V, Operating Supply Current=0.3-1.8uA, Package=DNP0006A, Temperature="-40°C to +85°C", Temperature Range High=+85°C, Temperature Range Low=-40°C, Automotive=No, Category=IC, ComponentLink2Description=Datasheet, ComponentLink2URL=http://www.ti.com/lit/ds/symlink/opt3001.pdf, Device Class L1=Sensors, Device Class L2="Optical Sensors", Device Class L3=unset, Digikey Description="SENSOR OPT 550NM AMBIENT 6USON", Height=0.65mm, Ipc Land Pattern Name=DFN200X200X60-6, Lead Free=Yes, Octopart=https://octopart.com/opt3001dnpr-texas+instruments-47324050, RoHS=TRUE, Sensor Output=I2C,SMBus, Standoff Height=0mm
U3: library part A111, "A111 Radar Sensor", Package="SMD-50 acconeer", Availability=Unavailable, MF=acconeer, MP=A111, price=None, SnapEDA_Link=https://www.snapeda.com/parts/A111/acconeer/view-part/2777907/?ref=snap
U4: library part CMP-04918-000086-1, "ULTRA LOW IQ BUCK CONVERTER", Manufacturer="Texas Instruments", Manufacturer Part Number=TPS62840DLCR, Max Junction Temp=+125°C, Max Supply Voltage=6.5V, Min Supply Voltage=1.8V, Nominal Supply Current=0.005-3000uA, Output Current=750mA, Output Voltage=1.8-3.3V, Package=DLC0008B, Switching Frequency=1.8MHz, Temperature="-40°C to +125°C", Temperature Range Low=-40°C, Automotive=No, Category=IC, ComponentLink2Description=Datasheet, ComponentLink2URL=http://www.ti.com/lit/ds/symlink/tps62840.pdf, Device Class L1="Integrated Circuits (ICs)", Device Class L2="Power Management ICs", Device Class L3="Voltage Regulators - Switching", Digikey Description="ULTRA LOW IQ BUCK CONVERTER", Height=1mm, Ipc Land Pattern Name=DFN200X150X100-8, Lead Free=Yes, Max Duty Cycle=100%, Mouser Description="60-nA IQ, 1.8-V to 6.5-VIN, high-efficiency 750-mA step-down converter 8-VSON-HR -40 to 125", Number Of Outputs=1, Octopart=https://octopart.com/tps62840dlcr-texas+instruments-103121111, Output Type=AdjustableProgrammable, RoHS=TRUE, Standoff Height=0mm, Switching Topology=Buck, Temperature Range High=+125°C
Y1 Y2: library part CMP-20727-000003-1, "CRYSTAL 48.0000MHZ 7PF SMD", Frequency=48000kHz, Load Capacitance=7pF, Manufacturer=Kyocera, Manufacturer Part Number=CX2016DB48000C0WPLA2, Package=0, Temperature="-40°C to +85°C", Temperature Range High=+85°C, Temperature Range Low=-40°C, Tolerance=20ppm, Automotive=No, Category=Crys, ComponentLink2Description=Datasheet, ComponentLink2URL=https://global.kyocera.com/prdct/electro/product/pdf/cx2016db_e.pdf, Device Class L1="Passive Components", Device Class L2="Crystals / Oscillators", Device Class L3=Crystals, Digikey Description="CRYSTAL 48.0000MHZ 7PF SMD", Esr=22Ω, Height=0.45mm, Lead Free=Yes, Mouser Description="Crystals 48MHz 7pF", Octopart=https://octopart.com/cx2016db48000c0wpla2-avx+%2F+kyocera-52876167, RoHS=TRUE, series=CX2016DB

## Via types
v1: diameter 17.72, hole 7.87, Top Layer to Bottom Layer, tented both sides, 251 vias
v2: diameter 19.68, hole 7.87, Top Layer to Bottom Layer, 2 vias

## Nets (pads, with @x,y where several pads share a name; then routed paths per layer and width w, separated by ;. In a path a pad name is that pad's centre, name@x,y a point inside that pad or via, vN(x,y) a via of type N, cw(c..) or ccw(c..) an arc to the next point about the centre after c; other vN are vias at no path point)
1V8: C5.2 C6.2 C7.2 C8.2 C9.2 C10.2 C11.2 C12.2 C13.2 C14.2 C17.2 C18.2 C19.2 C20.2 C21.1 C22.2 C24.2 J1.5 L3.2 R2.2 R4.2 R6.1 U1.14 U1.17 U1.38 U1.40 U1.41 U1.42 U2.1 U3.C2 U3.C9 U3.D1 U3.D10 U3.J9 U3.K9 U4.8 | length 1260.4
  Top Layer w6: U3.D1@1665,1625 1666.36,1625 U3.C2 ; U3.C9 1840.9,1623.82 1880.32,1623.82
  Top Layer w8: U1.14 2371.51,1184.35 2394.26,1184.35 2423.13,1155.49 2427.19,1155.49 C10.2 ; U1.17 2408.46,1231.93 C11.2@2434.61,1258.07 ; C13.2@2484.21,1287.68 C13.2 2510.05,1287.68 2517.37,1295 v1(2520,1295)
  Top Layer w10: C21.1@1540,1639 1546.32,1632.68 C18.2 1598.5,1632.18 1598.5,1597.5 v1(1598,1597) ; C18.2@1600,1634 1600,1632.46 1609.37,1623.09 U3.D1 ; C22.2@1821,1389 1822.32,1390.32 C17.2 ; U3.J9 U3.K9 1822.13,1504.79 1822.13,1445.19 C17.2 ; v1(1852,1444) 1851.5,1444.5 1822.82,1444.5 C17.2 ; 1880.32,1623.82 C19.2@1899.5,1623.82 ; v1(1899,1596) 1899.5,1596.5 C19.2@1899.5,1623.82 ; C19.2 1899.5,1627.18 C19.2@1899.5,1623.82 ; C20.2@1955,1627.32 1951.49,1623.82 1900,1623.82 C19.2@1899.5,1623.82 ; U2.1 2300.67,1682.48 2300.67,1725.67 C14.2@2305,1730 ; C14.2 2307.82,1728.39 2338.61,1728.39 v1(2340,1727) ; C11.2 2441.81,1264.49 2461.02,1264.49 2484.21,1287.68 2485,1288.46 C13.2@2485,1292
  Top Layer w12: v1(1171,1870) 1171.5,1870.5 1237.5,1870.5 J1.5 ; v1(2053.63,1310.64) 2054.72,1311.74 2054.72,1318.18 2079.21,1342.68 C7.2 ; C7.2@2082,1346 2082,1341.46 2097.05,1326.42 U1.38 ; v1(2154,1561) R4.2 ; R2.2 2357.14,1561.5 2395.5,1561.5 v1(2396,1562) ; R6.1 2466.09,1047.36 2468.45,1045 v1(2470,1045) ; C10.2 2435.79,1147.68 2450.79,1132.68 C12.2 v1(2485,1100)
  other v1: 2043,1240 2043,1265 1399,1293 1376,1299
GND: ANT1.1 B1.2 C2.1 C3.1 C4.1 C5.1 C6.1 C7.1 C8.1 C9.1 C10.1 C11.1 C12.1 C13.1 C14.1 C15.1 C16.1 C17.1 C18.1 C19.1 C20.1 C21.2 C22.1 C23.1 C24.1 D1.2 D2.2 D3.2 J1.10 U1.15 U1.39 U1.49 U2.2 U2.3 U2.7 U3.A3 U3.A4 U3.A5 U3.A6 U3.A7 U3.A8 U3.A9 U3.B2 U3.B9 U3.B10 U3.C1 U3.C10 U3.D2 U3.D9 U3.E1 U3.E2 U3.E9 U3.E10 U3.F1 U3.F2 U3.F9 U3.G1 U3.G10 U3.H1 U3.H2 U3.H9 U3.J3 U3.J5 U3.J6 U3.J8 U3.K4 U3.K5 U3.K7 U4.1 U4.3 U4.5 U4.6 Y1.2 Y2.2 Y2.4 | length 77.9
  Top Layer w6: U1.49 U1.49@2310.75,1200.43
  other v1: 1050,1050 1125,1050 1200,1050 1275,1050 1350,1050 1425,1050 1575,1050 1800,1050 2550,1050 2625,1050 2700,1050 2775,1050 2850,1050 2925,1050 3000,1050 1087.5,1125 1162.5,1125 1237.5,1125 1312.5,1125 1387.5,1125 1462.5,1125 1612.5,1125 2512.5,1125 2587.5,1125 2662.5,1125 2737.5,1125 2812.5,1125 2519,1185 2551,1185 2583,1185 2623,1185 2664,1185 2705,1185 2745,1185 2785,1185 2824,1185 1050,1200 1500,1200 1575,1200 1650,1200 1725,1200 1800,1200 3000,1200 2530.68,1244.86 2574,1245 2664,1245 2704,1245 2742,1245 2784,1245 2824,1245 1462.5,1275 1537.5,1275 1612.5,1275 1687.5,1275 1762.5,1275 1912.5,1275 2587.5,1275 2662.5,1275 2737.5,1275 2812.5,1275 2887.5,1275 2962.5,1275 3037.5,1275 2615,1283 1050,1350 1125,1350 1200,1350 1275,1350 1350,1350 1575,1350 1650,1350 2475,1350 2550,1350 2625,1350 2700,1350 2775,1350 2850,1350 2925,1350 3000,1350 1087.5,1425 1162.5,1425 1237.5,1425 1312.5,1425 1537.5,1425 1612.5,1425 1987.5,1425 2062.5,1425 2437.5,1425 2512.5,1425 2587.5,1425 2662.5,1425 2737.5,1425 2812.5,1425 2887.5,1425 2962.5,1425 3037.5,1425 1050,1500 1125,1500 1200,1500 1275,1500 1350,1500 1425,1500 1500,1500 2100,1500 2325,1500 2400,1500 2475,1500 2550,1500 2700,1500 2775,1500 2850,1500 2925,1500 1087.5,1575 1162.5,1575 1237.5,1575 1312.5,1575 1387.5,1575 1462.5,1575 1612.5,1575 1762.5,1575 1912.5,1575 1987.5,1575 2437.5,1575 2512.5,1575 2737.5,1575 2812.5,1575 2887.5,1575 1050,1650 1125,1650 1200,1650 1275,1650 1725,1650 1800,1650 2175,1650 2325,1650 2400,1650 2475,1650 2550,1650 2700,1650 2775,1650 2850,1650 2925,1650 3000,1650 1162.5,1725 1462.5,1725 1537.5,1725 1612.5,1725 1687.5,1725 1762.5,1725 1837.5,1725 2062.5,1725 2137.5,1725 2212.5,1725 2437.5,1725 2512.5,1725 2587.5,1725 2662.5,1725 2737.5,1725 2812.5,1725 2887.5,1725 2962.5,1725 3037.5,1725 1050,1800 1125,1800 1500,1800 1575,1800 1650,1800 1725,1800 1800,1800 2025,1800 2100,1800 2175,1800 2250,1800 2325,1800 2400,1800 2475,1800 2550,1800 2625,1800 2700,1800 2775,1800 2850,1800 2925,1800 3000,1800 1087.5,1875 1912.5,1875 1987.5,1875 2062.5,1875 2137.5,1875 2212.5,1875 2287.5,1875 2362.5,1875 2437.5,1875 2512.5,1875 2587.5,1875 2662.5,1875 2737.5,1875 2812.5,1875 2887.5,1875 2962.5,1875 3037.5,1875
  other v2: 2259.25,1645 2290.75,1645
HFXI: U1.11 Y1.1 | length 132.2
  Top Layer w5: Y1.1@2320,1035 Y1.1@2320,1038.82 ; U1.11 2327.56,1138.94 2327.56,1119.2 2331.41,1115.34 2331.41,1115.07 2347.58,1098.9 2347.85,1098.9 2351.66,1095.09 2351.66,1055.59 2329.41,1033.35 Y1.1@2327.44,1033.35
HFXO: U1.12 Y1.3 | length 81.4
  Top Layer w5: U1.12 2342.24,1116.97 2351.31,1107.9 2351.58,1107.9 2360.66,1098.82 2360.66,1098.56 2367.34,1091.87 2367.34,1089.9 2380.59,1076.65 Y1.3@2382.56,1076.65
I2C_SCL: R4.1 U1.35 U2.4 | length 268.2
  Top Layer w5: U1.35 2184.79,1414.82 2179.09,1420.52 2179.09,1453.09 2240,1514 2240,1593.27 2249,1602.27 U2.4@2249,1608
I2C_SDA: R2.1 U1.34 U2.6 | length 291.8
  Top Layer w5: U1.34 2201.24,1371.83 2201.24,1407.95 2196.47,1412.73 2196.47,1415.87 2188.09,1424.25 2188.09,1446.09 2300.59,1558.59 U2.6 2300.59,1608.59 U2.6@2302,1610
NetANT1_2: ANT1.2 C1.1 | length 109.4
  Top Layer w13.91: C1.1 2883,1215 ANT1.2@2884,1216
NetC1_2: C1.2 L1.1 | length 48.7
  Top Layer w13.91: L1.1 C1.2 C1.2@2746,1215
NetC2_2: C2.2 U1.36 | length 50.6
  Top Layer w10: C2.2@2157.54,1429 2157.32,1428.79 2157.32,1394.06 U1.36@2168.35,1383.03
NetC3_2: C3.2 L1.2 L2.1 | length 96.7
  Top Layer w13.91: L2.1 L1.2 L1.2@2664,1215
NetC4_2: C4.2 L2.2 U1.16 | length 163.7
  Top Layer w13.91: U1.16 2483.82,1216.18 C4.2 2486.18,1216.18 2530.82,1216.18 L2.2@2533,1214
NetC15_2: C15.2 U3.J10 Y2.1 | length 148.6
  Top Layer w5: U3.J10 1876.35,1489.94 1890.06,1489.94 Y2.1@1902.5,1477.5 ; Y2.1@1905,1480 1912.68,1472.32 C15.2 C15.2@1912.68,1415
NetC16_2: C16.2 U3.H10 Y2.3 | length 195.4
  Top Layer w5: U3.H10 1933.8,1544.35 1958.15,1520 Y2.3@1960,1520 ; Y2.3 C16.2@2015.68,1520 ; C16.2 C16.2@2015.68,1520 ; C16.2@2018,1522.32 C16.2@2015.68,1520 ; C16.2@2020,1520 C16.2@2015.68,1520
NetD1_1: D1.1 R1.1 | length 50.7
  Top Layer w5: D1.1@1455,1027.36 1503.36,1027.36 R1.1@1505,1029
NetD2_1: D2.1 R3.1 | length 63.6
  Top Layer w5: D2.1@1650,1027.36 R3.1@1705,1027.36 ; R3.1 1711.64,1034.36 R3.1@1713,1033
NetD3_1: D3.1 R5.1 | length 55.3
  Top Layer w5: D3.1@1835,1027.36 1882.36,1027.36 R5.1@1888,1033
NetL3_1: L3.1 U4.7
NetR1_2: R1.2 U1.8 | length 876.9
  Top Layer w4: v1(2271,1108) 2271,1111.01 2280,1120.01 U1.8@2280,1125
  Top Layer w5: v1(1509,1120) 1509,1080.64 R1.2
  Bottom Layer w5: v1@1509,1113 1544,1148 1906,1148 1973,1081 2244,1081 v1(2271,1108)
NetR3_2: R3.2 U1.9 | length 715.8
  Top Layer w4: v1(1704,1119) 1704,1080.64 R3.2
  Top Layer w5: v1(2291,1096) 2291,1112.64 2293.93,1115.57 2293.93,1137.93 U1.9@2295,1139
  Bottom Layer w5: v1(1704,1119) 1719,1134 1901,1134 1966,1069 2264,1069 v1(2291,1096)
NetR5_2: R5.2 U1.10 | length 551.4
  Top Layer w4: v1(1889,1116) 1889,1079.64 R5.2 ; v1(2310.75,1110.21) U1.10
  Bottom Layer w4: v1(1889,1116) 1891.56,1116 1948.56,1059 2289,1059 2310.75,1080.75 v1(2310.75,1110.21)
NetU1_20: U1.20 U3.J2 | length 928.3
  Top Layer w5: v1(1661,1502) 1661.24,1502 1683.91,1524.67 U3.J2 ; U1.20 2372.41,1277.94 2400.77,1277.94 v1(2402,1276.72) v1@2402,1276
  Bottom Layer w5: v1(1661,1502) 1661,1480.23 1814.23,1327 2378.86,1327 2386.93,1318.93 2386.66,1318.66 2386.66,1292.06 v1(2402,1276.72)
NetU1_21: U1.21 U3.K6 | length 883.8
  Top Layer w5: U3.K6 1762.94,1504.93 1762.94,1481.06 v1(1763,1481) ; U1.21 2395.09,1294.92 2399.58,1299.41 v1(2403.02,1299.41)
  Bottom Layer w5: v1(1763,1481) 1763,1437 1846,1354 2372,1354 2380,1362 2416,1362 2432.17,1345.83 2432.17,1311.41 2420.17,1299.41 v1(2403.02,1299.41)
NetU1_22: U1.22 U3.K3 | length 889.1
  Top Layer w5: U3.K3 1704.36,1504.45 1704.36,1482.56 v1(1704.9,1482.02) ; U1.22 2373.01,1312.5 2392.97,1312.5 2398.66,1318.18 v1(2415.81,1318.18)
  Bottom Layer w5: v1(1704.9,1482.02) 1704.9,1461.79 1821.68,1345 2375.73,1345 2383.73,1353 2410.51,1353 2419.62,1343.9 2419.62,1330.34 2418.24,1328.97 2418.24,1324.06 v1@2413.18,1319
NetU1_23: U1.23 U3.K2 | length 847.7
  Top Layer w5: v1(1682.18,1482.18) 1683.16,1483.16 1683.16,1504 U3.K2 ; U1.23 2394.42,1326.42 2402.56,1334.56 v1(2402.56,1336.64)
  Bottom Layer w5: v1(1682.18,1482.18) 1682.18,1481.6 1695.9,1467.89 1695.9,1458.06 1817.96,1336 2401.92,1336 v1(2402.56,1336.64)
NetU1_30: U1.30 U3.F10 | length 741.7
  Top Layer w5: U3.F10 1841.76,1583.86 1865.86,1583.86 v1(1866,1584) ; v1(2259,1418) 2259.86,1417.14 2259.86,1398.01 2263.5,1394.36 U1.30
  Bottom Layer w5: v1@1867,1589 1867,1585 v1(1866,1584) 1848.78,1566.78 1838.78,1566.78 1824,1552 1824,1414 1864,1374 2192.97,1374 2236.72,1417.75 2258.75,1417.75 v1(2259,1418)
NetU1_31: U1.31 U3.K8 | length 603.8
  Top Layer w5: v1(1802,1482) 1802.13,1482.13 1802.13,1504.86 U3.K8 ; v1(2243.5,1401.39) 2245.93,1398.97 2245.93,1372.93 U1.31
  Bottom Layer w5: v1(1802,1482) 1802,1412 1850,1364 2206.11,1364 v1(2243.5,1401.39) 2244.11,1402 v1@2245,1402
nRST: J1.4 R6.2 U1.13 | length 1702.5
  Top Layer w5: v1(1165,1820) 1168.44,1820 1170.92,1822.48 1224.48,1822.48 J1.4@1235,1833 ; U1.13 2383.78,1168.94 2385.61,1167.11 2385.61,1144.98 v1@2398.59,1132 ; v1(2400,1132) v1@2398.59,1132 ; R6.2@2430,1095 2430,1100.59 v1@2398.59,1132
  Bottom Layer w5: v1(1165,1820) 1282.64,1702.36 1426.14,1702.36 1994,1134.5 2208.5,1134.5 2211,1132 v1(2400,1132)
OPT_INT: U1.19 U2.5 | length 475.1
  Top Layer w5: v1(2274,1564) 2274.5,1564.5 2274.5,1607.1 U2.5 ; U1.19 2373.01,1261.59 2390.96,1261.59 2398.56,1254 v1(2402,1254)
  Bottom Layer w5: v1(2274,1564) 2274,1521 2442,1353 2442,1293.58 2402.42,1254 v1(2402,1254)
PTI_DATA: J1.6 U1.4 | length 1121.5
  Top Layer w4: J1.6@1382,1710 1386,1706 v1(1386,1686) ; 2216.26,1118.43 U1.4@2216.26,1134.26 ; U1.4 U1.4@2216.26,1134.26 ; U1.4@2217,1135 U1.4@2216.26,1134.26
  Bottom Layer w4: v1(1386,1686) 1425,1686 1985,1126 2204.98,1126 v1(2220.71,1110.26)
PTI_FRAME: J1.1 U1.3 | length 1256.6
  Top Layer w5: J1.1 1261.48,1711 1270,1702.48 1270,1680 v1@1265,1675 ; v1(2198,1110) v1@2199.26,1111.26 ; v1@2199.26,1113.26 2199.26,1138.74 U1.3
  Bottom Layer w5: v1(1270,1676) 1273.13,1676 1283.13,1666 1430,1666 1986,1110 v1(2198,1110)
RX: J1.9 U1.33 | length 1058.1
  Top Layer w5: J1.9@1382,1834 1382.36,1834.36 v1(1458,1834.36) ; v1(2204.45,1437.25) 2204.45,1433.81 2212.82,1425.43 2212.82,1412.52 2216.26,1409.08 U1.33
  Bottom Layer w5: v1(1458,1834.36) 1458.36,1834 1807.7,1834 v1(2204.45,1437.25)
SWCLK: J1.7 U1.27 | length 1488.7
  Top Layer w5: v1@1315,1773 1315,1769 1324.48,1759.52 1379.48,1759.52 J1.7 ; U1.27 2311.05,1371.41 2311.05,1402.69 v1(2311.36,1403)
  Bottom Layer w5: v1(1312,1772) 1275.66,1808.34 1275.66,1865.52 1302.57,1892.43 1845.7,1892.43 2311.36,1426.78 v1(2311.36,1403)
SWDIO: J1.2 U1.28 | length 1465.2
  Top Layer w5: J1.2@1231,1749 1272.22,1749 1295.59,1772.37 1295.59,1778.72 1308.43,1791.57 1320.57,1791.57 v1(1323,1794) ; v1(2293.49,1419.6) 2295,1418.09 U1.28
  Bottom Layer w5: v1(1323,1794) 1320.57,1796.43 1306.69,1796.43 1284.66,1818.47 1284.66,1861.79 1306.3,1883.43 1808.43,1883.43 2147.22,1544.64 2168.45,1544.64 v1(2293.49,1419.6)
SWO: J1.8 U1.29 | length 1178.8
  Top Layer w5: J1.8 1396.52,1799.52 1446.3,1799.52 1488,1841.22 1488,1870 v1@1487,1871 ; v1(2278.64,1402) 2278.95,1401.69 2278.95,1371.41 U1.29
  Bottom Layer w5: v1(1486,1867.07) 1812.06,1867.07 2143.5,1535.64 2164.49,1535.64 2277.13,1423 2277.13,1403.51 v1(2278.64,1402)
TX: J1.3 U1.32 | length 1254.3
  Top Layer w5: J1.3@1239,1792 1275.22,1792 1296.21,1812.99 1308.41,1812.99 v1(1310.84,1815.42) ; v1(2229.8,1432.57) 2227.37,1430.14 2227.37,1422.92 2227.14,1422.7 2227.14,1394.62 2230.18,1391.58 2230.18,1372.93 U1.32
  Bottom Layer w5: v1(1310.84,1815.42) 1415.93,1815.42 1451.22,1850.72 1814.12,1850.72 2229.8,1435.03 v1(2229.8,1432.57)
VIN: B1.1 C23.2 U4.2 U4.4 | length 60.4
  Top Layer w5: C23.2@1225,1208.39 C23.2@1225,1209 ; C23.2@1229,1208.39 1246.92,1190.47 U4.4
pads on no net: ANT1.3 ANT1.4 B1.3 B1.4 J1.11 J1.12 U1.1 U1.2 U1.5 U1.6 U1.7 U1.18 U1.24 U1.25 U1.26 U1.37 U1.43 U1.44 U1.45 U1.46 U1.47 U1.48 U3.A2 U3.B1 U3.J1 Y1.4

## Polygon pours and split planes (outlines as drawn)
NetL3_1 on Top Layer "NETL3_1_L01_P003" (solid, pour order 3): 1320,1235 1362,1235 1374,1223 1428,1223 1434,1217 1434,1189 1369,1189 1360,1198 1360,1213 1348,1225 1320,1225
1V8 on Top Layer "1V8_L01_P002" (solid, pour order 2): 1316,1321 1391,1321 1434,1278 1434,1245 1316,1245
GND on Top Layer "GND_L01_P004" (solid, pour order 4): 1006,1977 3089,1977 3089,998 3087,996 1003,996
VIN on Top Layer "VIN" (solid, pour order 1): 1077,1253.82 1100.86,1269 1172,1269 1206,1235 1293,1235 1293,1226 1292,1225 1261,1225 1258,1222 1258,1198 1245,1185 1109,1185 1077,1217
1V8 on Top Layer "1V8_L01_P000" (solid, pour order 0): 2157,1299 2117,1299 2093,1275 1986,1275 1984,1273 1984,1243 2015,1212 2015,1188 2051,1188 2067,1204 2093,1204 2093,1229 2124,1260 2157,1260 2157,1261
GND on Bottom Layer "GND_L04_P008" (solid, pour order 8): 1006,1975 3089,1975 3089,1000 3085,1004 1006,1004
GND on Layer 1 "GND_L02_P005" (solid, pour order 5): 1006,1973 3085,1973 3084,1972 3084,995 1007,995 1006,996
1V8 on Layer 2 "1V8_L03_P007" (solid, pour order 7): 1006,1976.5 3080,1976.5 2537,1433.5 2537,1004.5 1007,1004.5 1006,1005.5

## Keep-outs
Top Layer:
  region: 2420,1232 2421,1230 2422,1228 2464,1228 2464,1254 2462,1254 2453,1254 2453,1241 2429,1241
  region: 2396,1193 2396,1205 2413,1205 2413,1180 2400,1193
  region: 3087,1599 2973,1599 2973,1504 3087,1504 3087,1523.5 2989,1523.5 2989,1580.5 3087,1580.5
  region: 2839,1202 2846,1202 2846,1188 2914,1188 2914,1245 2846,1245 2846,1229 2839,1229 2839,1253 2922,1253 2922,1180 2839,1180
  region: 3090,1175 2976,1175 2976,1086 3090,1086 3090,1102 2992,1102 2992,1159 3090,1159

## Other copper
Top Layer: